# Altium PCB ALCT_MEZ_LX150T.PcbDoc (part 7 of 9)
Units mil, origin at the board's own origin, x right, y up, seen from the top; angles counter-clockwise.
Board outline 4101.98 x 5875.01 mil, 12 copper layers (Top Layer, Mid-Layer 1, +3V3, Mid-Layer 2, +1V2, Mid-Layer 4, +2V5, Mid-Layer 5, GND1, Mid-Layer 7, GND2, Bottom Layer), stack 64.7 mil thick; 378 components, 616 nets, 2492 pads, 1686 vias.
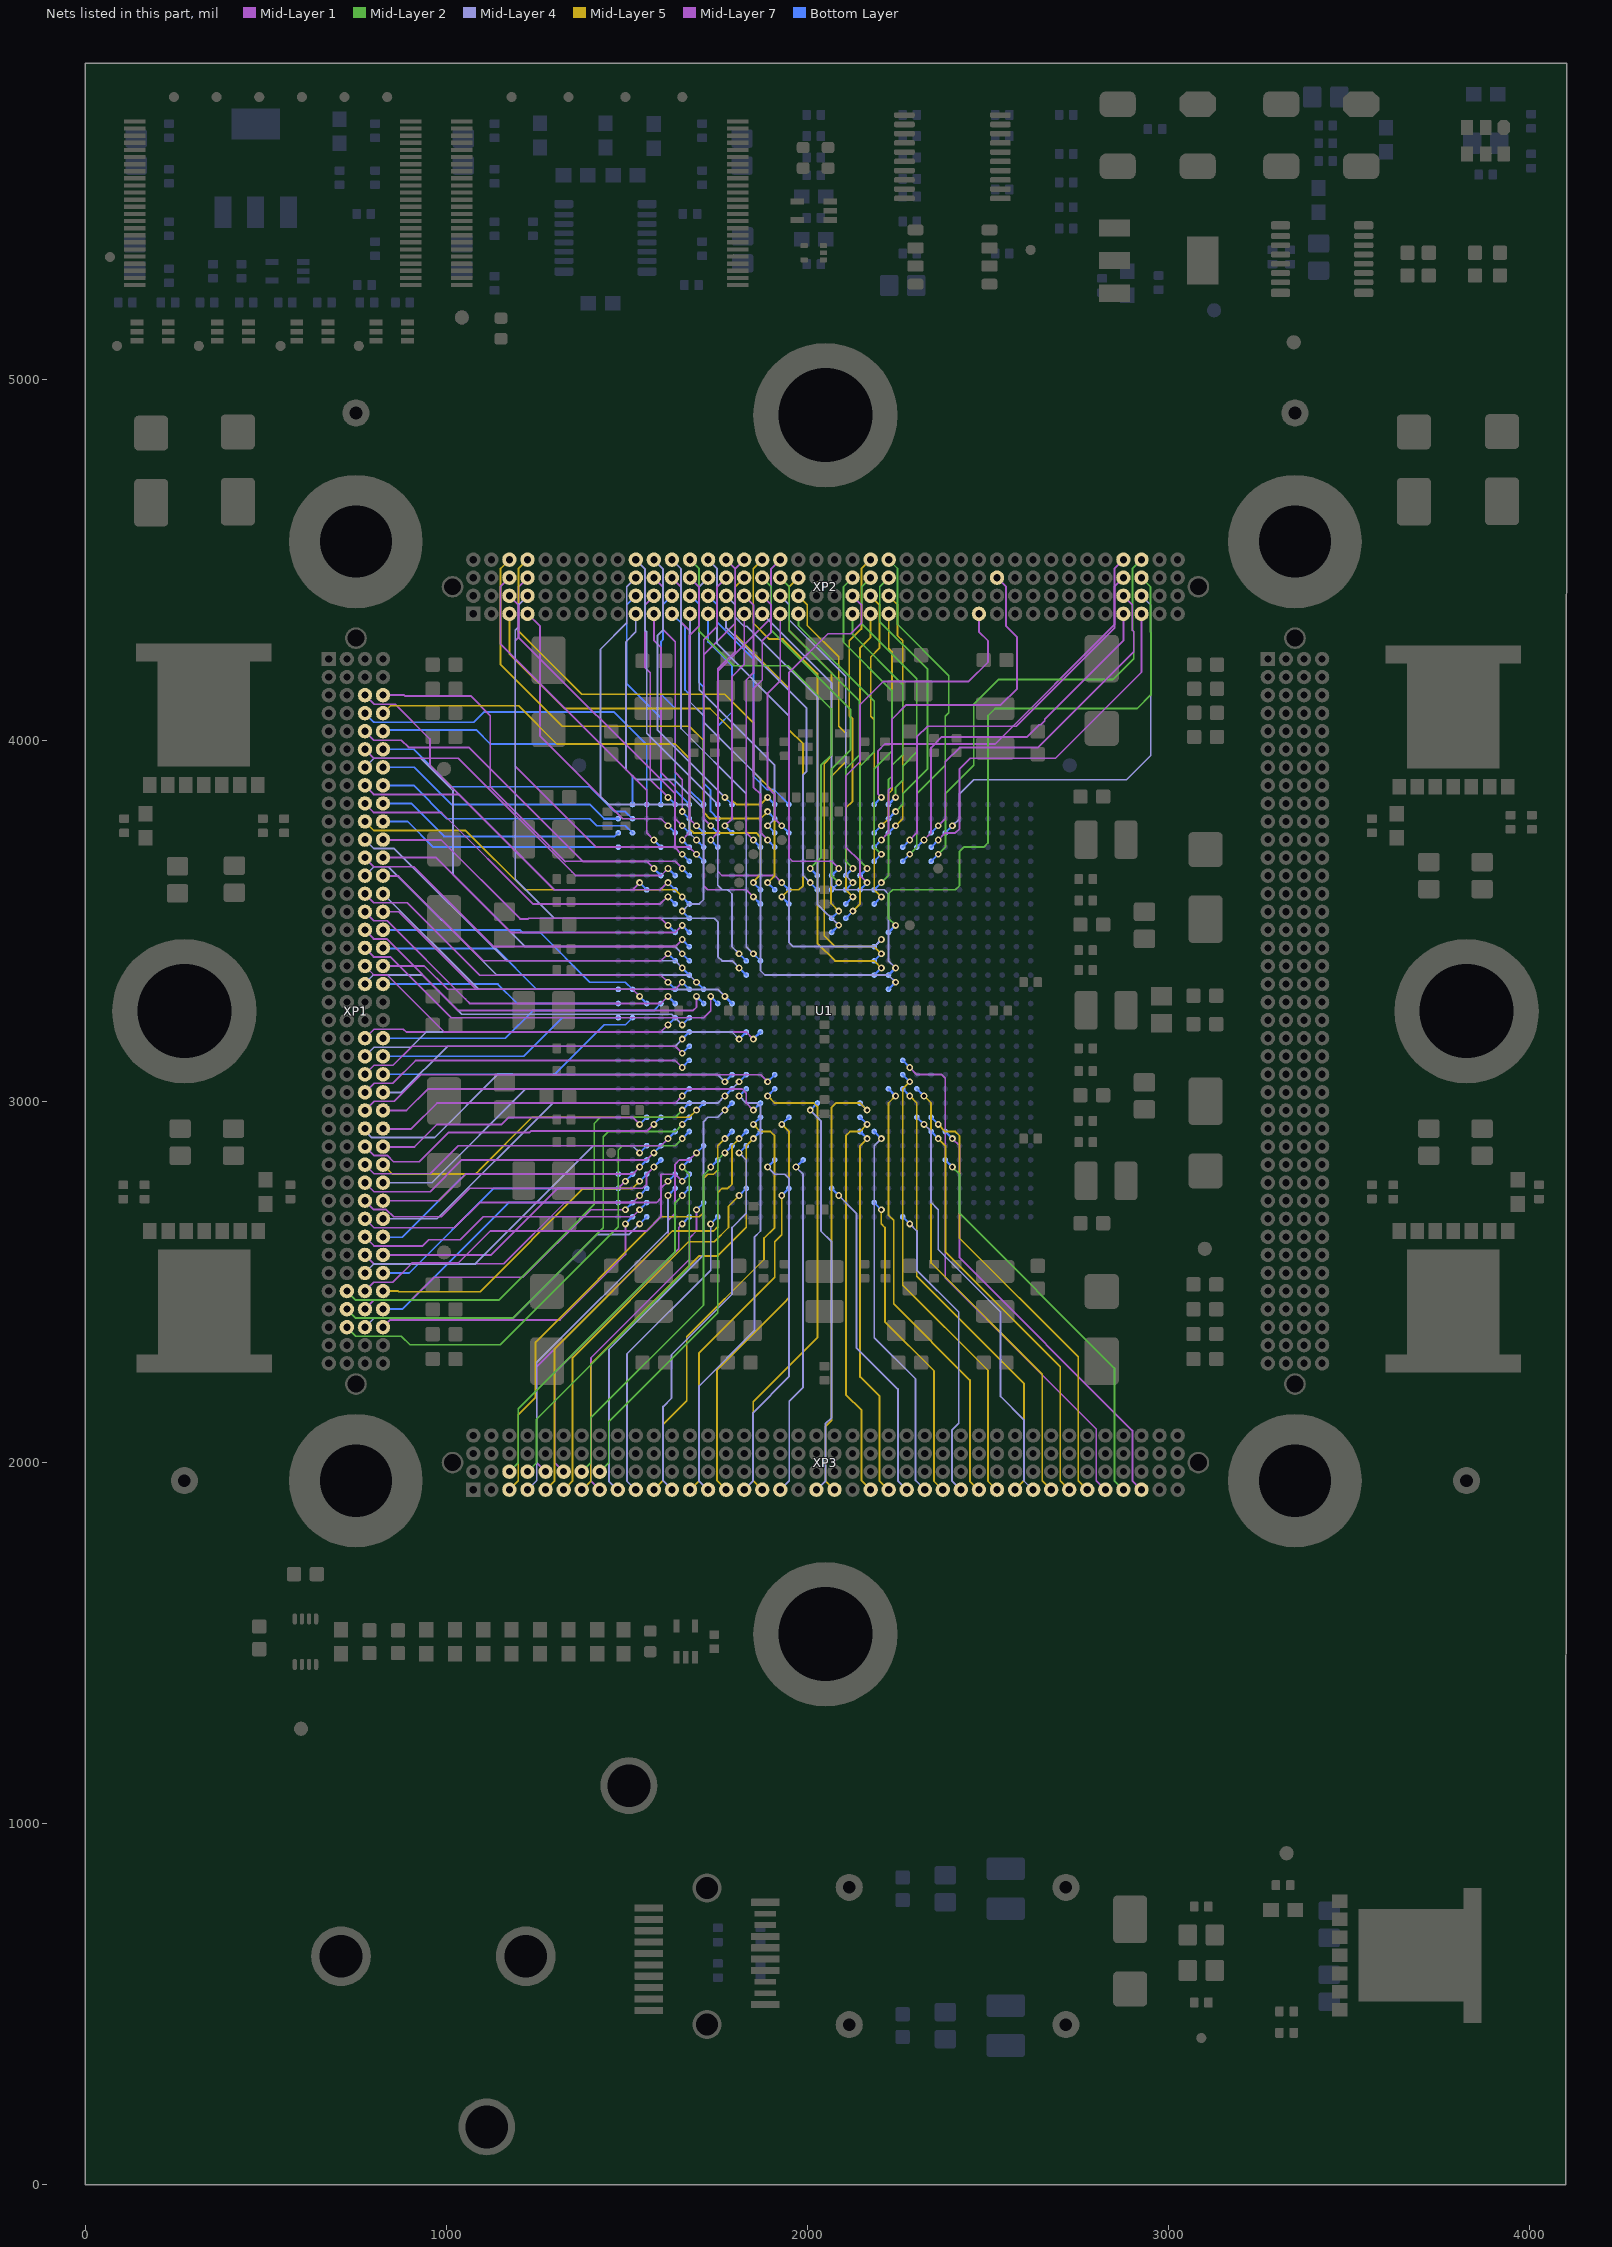
[diagram p16: the nets of this part, all layers, seen from the top]

## Via types
v1: diameter 19, hole 10, Top Layer to Bottom Layer, tented both sides, 1667 vias
v2: diameter 40, hole 20, Top Layer to Bottom Layer, 12 vias
v3: diameter 19, hole 10, Top Layer to Bottom Layer, 7 vias

## Nets (pads, with @x,y where several pads share a name; then routed paths per layer and width w, separated by ;. In a path a pad name is that pad's centre, name@x,y a point inside that pad or via, vN(x,y) a via of type N, cw(c..) or ccw(c..) an arc to the next point about the centre after c; other vN are vias at no path point) (continued)
XP1B_36: U1.AE9 XP1.B36 | length 1316
  Mid-Layer 2 w5: XP1.B36@725,2475.01 750,2450.01 1145.49,2450.01 1368.3,2672.81 1368.3,2673.32 1409.94,2714.97 1409.94,2938.88 1426.98,2955.92 1633.7,2955.92 v1(1653.56,2975.78)
  Bottom Layer w6: v1(1653.56,2975.78) U1.AE9@1673.23,2995.48
XP1B_37: U1.AE8 XP1.B37 | length 1336.6
  Mid-Layer 2 w5: XP1.B37@725,2425.01 750,2400.01 1184.07,2400.01 1434.55,2650.48 1434.55,2902.48 1448.62,2916.56 1633.7,2916.56 v1(1653.56,2936.42)
  Bottom Layer w6: v1(1653.56,2936.42) U1.AE8@1673.23,2956.11
XP1B_38: U1.AE7 XP1.B38 | length 1337.8
  Mid-Layer 2 w5: XP1.B38@725,2375.01 750,2350.01 875.98,2350.01 899.8,2326.19 1149.9,2326.19 1476.38,2652.66 1476.38,2865.57 1487.99,2877.19 1633.7,2877.19 v1(1653.56,2897.05)
  Bottom Layer w6: v1(1653.56,2897.05) U1.AE7@1673.23,2916.74
XP1C_3: U1.AH24 XP1.C3 | length 1067.1
  Mid-Layer 7 w5: XP1.C3@775,4120.08 XP1.C3@775,4125.01 800.5,4099.51 858.59,4099.51 954.72,4003.37 954.72,3930.5 1299.02,3586.2 1515.94,3586.2 v1(1535.44,3605.7)
  Bottom Layer w6: v1(1535.44,3605.7) U1.AH24@1555.13,3586.02
XP1C_4: U1.AH30 XP1.C4 | length 1004.4
  Bottom Layer w5: XP1.C4@775,4073.82 798,4050.82 800,4050.82 800.82,4050.01 1076.2,4050.01 1104.16,4077.97 1464.77,4077.97 1555.12,3987.62 U1.AH30@1555.12,3822.25
XP1C_5: U1.AG25 XP1.C5 | length 984.5
  Mid-Layer 1 w5: XP1.C5@775,4023.82 798.82,4000.01 875.98,4000.01 895.67,3980.32 1062.4,3980.32 1378.14,3664.58 1555.29,3664.58 v1(1574.81,3645.07)
  Bottom Layer w6: v1(1574.81,3645.07) U1.AG25@1594.49,3625.4
XP1C_6: U1.AF25 XP1.C6 | length 1033
  Mid-Layer 1 w5: XP1.C6@775,3973.82 798.82,3950.01 1033.66,3950.01 1358.1,3625.57 ; 1348.43,3635.24 1358.1,3625.57 ; v1(1614.18,3645.07) 1594.68,3625.57 1358.1,3625.57
  Bottom Layer w6: v1(1614.18,3645.07) U1.AF25@1633.86,3625.4
XP1C_7: U1.AE19 XP1.C7 | length 1277
  Mid-Layer 4 w5: XP1.C7@775,3925.01 800,3950.01 929.33,3950.01 1018.53,3860.8 1018.53,3628.54 1218.52,3428.55 1633.86,3428.55 v1(1653.57,3408.84)
  Bottom Layer w6: v1(1653.57,3408.84) U1.AE19@1673.23,3389.18
XP1C_8: U1.AF24 XP1.C8 | length 995.4
  Mid-Layer 1 w5: XP1.C8@775,3873.82 798.82,3850.01 1035.22,3850.01 1299.02,3586.2 1592.29,3586.2 v1@1614.29,3608.2
  Bottom Layer w6: v1(1614.18,3605.7) U1.AF24@1633.86,3586.02
XP1C_9: U1.AF23 XP1.C9 | length 991
  Mid-Layer 1 w5: XP1.C9@775,3823.82 798.82,3800.01 986.81,3800.01 1239.98,3546.83 1592.29,3546.83 v1@1614.29,3568.83
  Bottom Layer w6: v1(1614.18,3566.33) U1.AF23@1633.86,3546.66
XP1C_10: U1.AE23 XP1.C10 | length 992.8
  Mid-Layer 5 w5: XP1.C10@775,3775.01 800,3750.01 1054.03,3750.01 1218.01,3586.03 1633.87,3586.03 v1(1653.56,3566.33)
  Bottom Layer w6: v1(1653.56,3566.33) U1.AE23@1673.23,3546.66
XP1C_11: U1.AE18 XP1.C11 | length 1053.7
  Mid-Layer 4 w5: XP1.C11@775,3725.01 800,3700.01 856.36,3700.01 1167.02,3389.34 1633.7,3389.34 v1(1653.56,3369.48)
  Bottom Layer w6: v1(1653.56,3369.48) U1.AE18@1673.23,3349.81
XP1C_12: U1.AE20 XP1.C12 | length 1016
  Mid-Layer 1 w5: XP1.C12@775,3673.82 798.82,3650.01 910.43,3650.01 1131.75,3428.69 1634.07,3428.69 v1(1653.57,3448.19)
  Bottom Layer w6: v1(1653.57,3448.19) U1.AE20@1673.24,3428.52
XP1C_13: U1.AD17 XP1.C13 | length 1088.6
  Mid-Layer 4 w5: XP1.C13@775,3625.01 800,3650.01 839.57,3650.01 1139.59,3349.98 1673.06,3349.98 v1(1692.93,3330.12)
  Bottom Layer w6: v1(1692.93,3330.12) U1.AD17@1712.6,3310.44
XP1C_14: U1.AF17 XP1.C14 | length 968
  Mid-Layer 1 w5: XP1.C14@775,3573.82 798.82,3550.01 892.32,3550.01 1092.71,3349.62 1594.68,3349.62 v1(1614.18,3330.12)
  Bottom Layer w6: v1(1614.18,3330.12) U1.AF17@1633.86,3310.44
XP1C_15: U1.AF16 XP1.C15 | length 980.1
  Mid-Layer 1 w5: XP1.C15@775,3523.82 798.82,3500.01 836.71,3500.01 1053.33,3283.38 1053.33,3282.68 1064.76,3271.25 1594.68,3271.25 v1(1614.18,3290.75)
  Bottom Layer w6: v1(1614.18,3290.75) U1.AF16@1633.86,3271.07
XP1C_16: U1.AD16 XP1.C16 | length 1071.5
  Mid-Layer 1 w5: XP1.C16@775,3473.82 798.82,3450.01 834.84,3450.01 1033.46,3251.38 1683.07,3251.38 1692.93,3261.24 v1(1692.93,3290.75)
  Bottom Layer w6: v1(1692.93,3290.75) U1.AD16@1712.6,3271.07
XP1C_17: U1.AC16 XP1.C17 | length 1112.2
  Mid-Layer 1 w5: XP1.C17@775,3423.82 798.82,3400.01 845.47,3400.01 1013.78,3231.7 1712.6,3231.7 1732.29,3251.39 v1(1732.29,3290.75)
  Bottom Layer w6: v1(1732.29,3290.75) U1.AC16@1751.98,3271.07
XP1C_18: U1.AF15 XP1.C18 | length 950.7
  Mid-Layer 1 w5: XP1.C18@775,3375.01 800,3350.01 836.42,3350.01 993.92,3192.5 1594.68,3192.5 v1(1614.18,3212)
  Bottom Layer w6: v1(1614.18,3212) U1.AF15@1633.86,3231.7
XP1C_19: U1.AE15 XP1.C19 | length 975.3
  Mid-Layer 4 w5: XP1.C19@775,3325.01 775,3327.56 797.24,3349.81 935.04,3349.81 1043.31,3241.54 1624.02,3241.54 v1(1653.56,3212)
  Bottom Layer w6: v1(1653.56,3212) U1.AE15@1673.23,3231.7
XP1C_22: U1.Y14 XP1.C22 | length 1124.9
  Mid-Layer 7 w5: XP1.C22@775,3175.01 800,3200.01 881.4,3200.01 889.08,3192.33 1830.7,3192.33 v1(1850.39,3172.63)
  Bottom Layer w6: v1(1850.39,3172.63) U1.Y14@1870.08,3192.32
XP1C_23: U1.AA14 XP1.C23 | length 1099.9
  Mid-Layer 4 w5: XP1.C23@775,3125.01 800,3150.01 902.56,3150.01 944.88,3192.33 1791.34,3192.33 v1(1811.02,3172.64)
  Bottom Layer w6: v1(1811.02,3172.64) U1.AA14@1830.71,3192.33
XP1C_24: U1.AE13 XP1.C24 | length 947.7
  Mid-Layer 1 w5: XP1.C24@775,3073.82 XP1.C24@775.59,3074.41 ; XP1.C24@775,3075.01 800,3100.01 852.56,3100.01 905.51,3152.96 1633.87,3152.96 v1(1653.56,3133.27)
  Bottom Layer w6: v1(1653.56,3133.27) U1.AE13@1673.23,3152.96
XP1C_25: U1.AE12 XP1.C25 | length 951.1
  Mid-Layer 1 w5: XP1.C25@775,3025.01 800.5,3050.51 852.27,3050.51 915.17,3113.4 1634.06,3113.4 v1(1653.56,3093.9)
  Bottom Layer w6: v1(1653.56,3093.9) U1.AE12@1673.23,3113.59
XP1C_26: U1.W11 XP1.C26 | length 1191.7
  Mid-Layer 1 w5: XP1.C26@775,2975.01 800.5,3000.51 856.41,3000.51 929.93,3074.03 1870.28,3074.03 v1(1889.78,3054.53)
  Bottom Layer w6: v1(1889.78,3054.53) U1.W11@1909.45,3074.22
XP1C_27: U1.AB11 XP1.C27 | length 1118.5
  Mid-Layer 4 w5: XP1.C27@775,2925.01 775,2919.3 794.29,2900.01 967.52,2900.01 1141.73,3074.22 1751.97,3074.22 v1(1771.66,3054.53)
  Bottom Layer w6: v1(1771.66,3054.53) U1.AB11@1791.34,3074.22
XP1C_28: U1.AG8 XP1.C28 | length 887.8
  Mid-Layer 1 w5: XP1.C28@775,2875.01 799.5,2850.51 836.61,2850.51 854.04,2833.08 925.2,2833.08 1005.7,2913.58 1230.32,2913.58 1235.15,2918.42 1556.81,2918.42 v1(1574.81,2936.42)
  Bottom Layer w6: v1(1574.81,2936.42) U1.AG8@1594.49,2956.11
XP1C_29: U1.AF7 XP1.C29 | length 917.6
  Mid-Layer 1 w5: XP1.C29@775,2825.01 800,2800.01 956.1,2800.01 1033.65,2877.55 1594.68,2877.55 v1(1614.18,2897.05)
  Bottom Layer w6: v1(1614.18,2897.05) U1.AF7@1633.86,2916.74
XP1C_30: U1.AG6 XP1.C30 | length 882.6
  Mid-Layer 1 w5: XP1.C30@775,2775.01 800,2750.01 955.31,2750.01 1043.49,2838.18 1555.31,2838.18 v1(1574.81,2857.68)
  Bottom Layer w6: v1(1574.81,2857.68) U1.AG6@1594.49,2877.37
XP1C_31: U1.AG5 XP1.C31 | length 919.3
  Mid-Layer 1 w5: XP1.C31@775,2725.01 799.5,2700.51 834.15,2700.51 854.14,2680.52 986.2,2680.52 1065.13,2759.44 1543.51,2759.44 1554.93,2770.87 1554.93,2798.42 v1(1574.81,2818.3)
  Bottom Layer w6: v1(1574.81,2818.3) U1.AG5@1594.49,2838
XP1C_32: U1.AH3 XP1.C32 | length 835.7
  Mid-Layer 1 w5: XP1.C32@775,2675.01 800,2650.01 1022.64,2650.01 1092.52,2719.89 1515.76,2719.89 v1(1535.44,2739.57)
  Bottom Layer w6: v1(1535.44,2739.57) U1.AH3@1555.12,2759.26
XP1C_33: U1.AH2 XP1.C33 | length 840.1
  Mid-Layer 1 w5: XP1.C33@775,2625.01 800,2600.01 935.04,2600.01 952.17,2617.13 1038.98,2617.13 1102.36,2680.52 1515.76,2680.52 v1@1536.12,2700.87
  Bottom Layer w6: v1@1536.12,2700.87 U1.AH2@1555.12,2719.89
  other v1: 1535.43,2700.2
XP1C_34: U1.AF4 XP1.C34 | length 987.9
  Mid-Layer 7 w5: XP1.C34@775,2575.01 799.5,2550.51 1159.36,2550.51 1328.92,2720.07 1582.89,2720.07 1594.31,2731.49 1594.31,2759.07 v1(1614.18,2778.93)
  Bottom Layer w6: v1(1614.18,2778.93) U1.AF4@1633.86,2798.62
XP1C_35: U1.AH6 XP1.C35 | length 942.4
  Mid-Layer 4 w5: XP1.C35@775,2525.01 800,2550.01 1080.12,2550.01 1407.48,2877.37 1515.76,2877.37 v1(1535.44,2857.68)
  Bottom Layer w6: v1(1535.44,2857.68) U1.AH6@1555.12,2877.37
XP1C_36: U1.AE4 XP1.C36 | length 1117.8
  Mid-Layer 1 w5: XP1.C36@775,2475.01 799.5,2499.51 852.45,2499.51 905.51,2552.56 1033.46,2552.56 1122.05,2641.15 1555.12,2641.15 1594.49,2680.52 1594.49,2798.63 1633.87,2798.63 v1(1653.56,2778.93)
  Bottom Layer w6: v1(1653.56,2778.93) U1.AE4@1673.24,2798.62
XP1C_37: U1.AJ2 XP1.C37 | length 862.9
  Mid-Layer 7 w5: XP1.C37@775,2425.01 800.5,2450.51 903.86,2450.51 966.37,2513.01 1212.4,2513.01 1399.59,2700.2 v1(1496.06,2700.2)
  Bottom Layer w6: v1(1496.06,2700.2) U1.AJ2@1515.75,2719.89
XP1C_38: U1.AH1 XP1.C38 | length 906.7
  Mid-Layer 4 w5: XP1.C38@775,2375.01 800,2400.01 1186.02,2400.01 1417.32,2631.3 1505.91,2631.3 v1(1535.43,2660.83)
  Bottom Layer w5: v1(1535.43,2660.83) U1.AH1@1555.12,2680.52
XP1D_3: U1.AE25 XP1.D3 | length 1171.1
  Mid-Layer 7 w5: XP1.D3@825,4125.01 883.47,4125.01 885.83,4122.65 1067.71,4122.65 1122.05,4068.31 1122.05,3871.46 1329.43,3664.08 1330.11,3664.77 1633.85,3664.77 v1(1653.56,3645.07)
  Bottom Layer w6: v1(1653.56,3645.07) U1.AE25@1673.23,3625.4
XP1D_4: U1.Y24 XP1.D4 | length 1480.4
  Mid-Layer 5 w5: XP1.D4@825,4075.01 845.68,4095.69 1200.48,4095.69 1306.59,3989.57 1633.86,3989.57 1673.23,3950.2 1673.23,3755.32 1685.04,3743.51 1858.28,3743.51 1869.9,3731.89 1869.9,3627.72 1850.39,3608.21 v1(1850.39,3605.7)
  Bottom Layer w6: v1(1850.39,3605.7) U1.Y24@1870.06,3586.03
XP1D_5: U1.AJ30 XP1.D5 | length 826.2
  Bottom Layer w5: XP1.D5@825,4025.01 825,4028.76 1082.88,4028.76 1122.07,3989.57 1427.17,3989.57 1515.76,3900.98 U1.AJ30@1515.75,3822.25
XP1D_6: U1.AJ29 XP1.D6 | length 770.3
  Bottom Layer w5: XP1.D6@825,3975.01 910.24,3975.01 1013.78,3871.46 1397.64,3871.46 1466.54,3802.56 1496.06,3802.56 U1.AJ29@1515.75,3782.88
XP1D_7: U1.AK29 XP1.D7 | length 710.3
  Bottom Layer w5: XP1.D7@825,3925.01 911.02,3925.01 1013.78,3822.25 1397.64,3822.25 1437.01,3782.88
  Bottom Layer w6: 1437.01,3782.88 U1.AK29@1476.38,3782.88
XP1D_8: U1.AJ28 XP1.D8 | length 745.2
  Bottom Layer w5: XP1.D8@825,3875.01 909.84,3875.01 1001.97,3782.88 1397.64,3782.88 1417.32,3763.19 1496.06,3763.19 U1.AJ28@1515.75,3743.51
XP1D_9: U1.AK28 XP1.D9 | length 693.3
  Bottom Layer w5: XP1.D9@825,3825.01 902.76,3825.01 994.09,3733.67 1466.54,3733.67 U1.AK28@1476.38,3743.51
XP1D_10: U1.AK27 XP1.D10 | length 680.7
  Bottom Layer w5: XP1.D10@825,3775.01 893.7,3775.01 964.57,3704.14 U1.AK27@1476.38,3704.14
XP1D_11: U1.AF21 XP1.D11 | length 916.2
  Mid-Layer 1 w5: XP1.D11@825,3723.82 986.2,3723.82 1204.52,3505.51 1226.58,3505.51 1228.18,3507.1 1593.56,3507.1 1613.06,3487.6 v1(1614.18,3487.6)
  Bottom Layer w6: v1(1614.18,3487.6) U1.AF21@1633.86,3467.92
XP1D_12: U1.AE21 XP1.D12 | length 950.3
  Mid-Layer 1 w5: XP1.D12@825,3675.01 972.07,3675.01 1179.1,3467.97 1633.93,3467.97 v1(1653.56,3487.6)
  Bottom Layer w6: v1(1653.56,3487.6) U1.AE21@1673.23,3467.92
XP1D_13: U1.AF19 XP1.D13 | length 922.2
  Mid-Layer 1 w5: XP1.D13@825,3623.82 867.72,3623.82 1102.2,3389.34 1594.68,3389.34 v1(1614.18,3408.84)
  Bottom Layer w6: v1(1614.18,3408.84) U1.AF19@1633.86,3389.18
XP1D_14: U1.AB16 XP1.D14 | length 1092.2
  Mid-Layer 4 w5: XP1.D14@825,3575.01 1089.57,3310.44 1623.83,3310.44 1624.02,3310.25 1752.16,3310.25 v1(1771.66,3290.75)
  Bottom Layer w6: v1(1771.66,3290.75) U1.AB16@1791.34,3271.07
XP1D_15: U1.AE17 XP1.D15 | length 953.4
  Mid-Layer 1 w5: XP1.D15@825,3525.01 868.11,3525.01 1082.63,3310.49 1633.93,3310.49 v1(1653.56,3330.12)
  Bottom Layer w6: v1(1653.56,3330.12) U1.AE17@1673.23,3310.44
XP1D_16: U1.AJ17 XP1.D16 | length 758.9
  Bottom Layer w5: XP1.D16@825,3475.01 1203.54,3475.01 1210.44,3468.1 1259.66,3468.1 1397.64,3330.12 1496.06,3330.12 U1.AJ17@1515.75,3310.44
XP1D_17: U1.AK17 XP1.D17 | length 698.4
  Bottom Layer w5: XP1.D17@825,3423.82 1136.61,3423.82 1250,3310.44 U1.AK17@1476.38,3310.44
XP1D_18: U1.AH16 XP1.D18 | length 777.9
  Mid-Layer 7 w5: XP1.D18@825,3375.01 939.37,3375.01 1003.94,3310.44 1515.75,3310.44 v1(1535.43,3290.75)
  Bottom Layer w6: v1@1532.11,3294.08 U1.AH16@1555.12,3271.07
XP1D_19: U1.AK16 XP1.D19 | length 673.7
  Bottom Layer w5: XP1.D19@825,3325.01 1142.93,3325.01 1196.87,3271.07 U1.AK16@1476.38,3271.07
XP1D_22: U1.AG16 XP1.D22 | length 809.3
  Bottom Layer w5: XP1.D22@825,3175.01 1163.78,3175.01 1240.16,3251.38 1574.8,3251.38 U1.AG16@1594.49,3271.07
XP1D_23: U1.AK15 XP1.D23 | length 695.6
  Bottom Layer w5: XP1.D23@825,3125.01 1214.16,3125.01 1320.85,3231.7 U1.AK15@1476.38,3231.7
XP1D_24: U1.AJ15 XP1.D24 | length 755.7
  Bottom Layer w5: XP1.D24@825,3075.01 1300,3075.01 1437.31,3212.32 1496.37,3212.32 U1.AJ15@1515.75,3231.7
XP1D_25: U1.AE14 XP1.D25 | length 917.5
  Mid-Layer 4 w5: XP1.D25@825,3025.01 875.98,3025.01 1003.94,3152.96 1633.89,3152.96 v1(1653.56,3172.63)
  Bottom Layer w6: v1(1653.56,3172.63) U1.AE14@1673.24,3192.32
XP1D_26: U1.Y9 XP1.D26 | length 1118.6
  Mid-Layer 1 w5: XP1.D26@825,2975.01 889.96,2975.01 949.73,3034.78 1818.97,3034.78 1830.53,3023.23 1830.53,2995.65 v1(1850.39,2975.78)
  Bottom Layer w6: v1(1850.39,2975.78) U1.Y9@1870.08,2995.48
XP1D_27: U1.AE10 XP1.D27 | length 894.2
  Mid-Layer 1 w5: XP1.D27@825,2923.82 902.76,2923.82 974.58,2995.65 1634.06,2995.65 v1(1653.56,3015.15)
  Bottom Layer w6: v1(1653.56,3015.15) U1.AE10@1673.23,3034.85
XP1D_28: U1.AH8 XP1.D28 | length 780.4
  Mid-Layer 1 w5: XP1.D28@825,2873.82 911.81,2873.82 974.41,2936.42 1153.53,2936.42 1173.03,2955.92 1515.94,2955.92 v1(1535.44,2936.42)
  Bottom Layer w6: v1(1535.44,2936.42) U1.AH8@1555.12,2956.11
XP1D_29: U1.AD9 XP1.D29 | length 980.2
  Mid-Layer 5 w5: XP1.D29@825,2825.01 851.19,2798.81 1080.91,2798.81 1092.33,2810.24 1092.33,2810.75 1237.51,2955.92 1673.07,2955.92 v1(1692.93,2975.78)
  Bottom Layer w6: v1(1692.93,2975.78) U1.AD9@1712.6,2995.48
XP1D_30: U1.AA11 XP1.D30 | length 1129.6
  Mid-Layer 4 w5: XP1.D30@825,2775.01 960.63,2775.01 1220.47,3034.85 1791.34,3034.85 v1(1811.03,3054.53)
  Bottom Layer w6: v1(1811.03,3054.53) U1.AA11@1830.71,3074.22
XP1D_31: U1.AH5 XP1.D31 | length 781.1
  Mid-Layer 1 w5: XP1.D31@825,2723.82 XP1.D31@828.25,2720.57 ; XP1.D31@825,2725.01 979.53,2725.01 1053.32,2798.8 1515.94,2798.8 v1@1535.13,2817.99
  Bottom Layer w6: v1(1535.44,2818.3) U1.AH5@1555.12,2838
XP1D_32: U1.AB10 XP1.D32 | length 1115.4
  Mid-Layer 4 w5: XP1.D32@825,2675.01 974.41,2675.01 1294.88,2995.48 1751.99,2995.48 v1(1771.66,3015.15)
  Bottom Layer w6: v1(1771.66,3015.15) U1.AB10@1791.34,3034.85
XP1D_33: U1.AK4 XP1.D33 | length 723.8
  Bottom Layer w5: XP1.D33@825,2623.82 878.35,2623.82 1053.15,2798.63 U1.AK4@1476.38,2798.63
XP1D_34: U1.AJ4 XP1.D34 | length 783.4
  Mid-Layer 7 w5: XP1.D34@825,2575.01 1124.8,2575.01 1309.06,2759.26 1476.38,2759.26 v1(1496.06,2778.94)
  Bottom Layer w6: v1@1496.09,2778.94 U1.AJ4@1515.76,2798.62
XP1D_35: U1.AK3 XP1.D35 | length 748.4
  Bottom Layer w5: XP1.D35@825,2525.01 897.64,2525.01 1131.89,2759.26 U1.AK3@1476.38,2759.26
XP1D_36: U1.AH4 XP1.D36 | length 865.6
  Mid-Layer 5 w5: XP1.D36@825,2475.01 866.14,2475.01 867.93,2473.22 1093.87,2473.22 1379.9,2759.26 1515.75,2759.26 v1(1535.43,2778.94)
  Bottom Layer w6: v1(1535.43,2778.94) U1.AH4@1555.13,2798.62
XP1D_37: U1.AK2 XP1.D37 | length 773.5
  Bottom Layer w5: XP1.D37@825,2425.01 878.36,2425.01 1173.25,2719.89 U1.AK2@1476.38,2719.89
XP1D_38: U1.AJ1 XP1.D38 | length 867
  Mid-Layer 7 w5: XP1.D38@825,2375.01 825,2375.21 844.87,2395.08 1314.98,2395.08 1496.06,2576.17 v1(1496.06,2660.83)
  Bottom Layer w6: v1(1496.06,2660.83) U1.AJ1@1515.75,2680.52
XP2A_3: U1.W30 XP2.A3 | length 1146.8
  Mid-Layer 5 w5: XP2.A3@1175,4350.01 1175,4239.79 1326.79,4088 1730.33,4088 1791.15,4027.18 1791.15,3834.23 1802.95,3822.43 1870.26,3822.43 v1(1889.76,3841.93)
  Bottom Layer w6: v1(1889.76,3841.93) U1.W30@1909.45,3822.25
XP2A_4: U1.AF28 XP2.A4 | length 838.1
  Mid-Layer 7 w5: XP2.A4@1225,4350.01 1259.84,4315.16 1259.84,4011.21 1488.36,3782.69 1594.68,3782.69 v1(1614.18,3763.19)
  Bottom Layer w6: v1(1614.18,3763.19) U1.AF28@1633.86,3743.51
XP2A_10: U1.AE22 XP2.A10 | length 1054.1
  Mid-Layer 4 w5: XP2.A10@1525,4350.01 1525,4300.01 1497.69,4272.69 1497.69,3919.05 1525.59,3891.15 1631.91,3891.15 1712.6,3810.46 1712.6,3576.19 1712.43,3576.01 1712.43,3558.26 1701,3546.83 1683.25,3546.83 1683.05,3546.64 1673.23,3546.64 v1(1653.56,3526.97)
  Bottom Layer w6: v1(1653.56,3526.97) U1.AE22@1673.23,3507.29
XP2A_11: U1.AE28 XP2.A11 | length 647.2
  Mid-Layer 7 w5: XP2.A11@1575,4350.01 1575,4276.76 1594.49,4257.27 1594.49,3910.83 1633.86,3871.46 1633.86,3782.9 v1(1653.57,3763.19)
  Bottom Layer w6: v1(1653.57,3763.19) U1.AE28@1673.23,3743.51
XP2A_12: U1.AD30 XP2.A12 | length 564.1
  Bottom Layer w5: XP2.A12@1625,4350.01 1661.44,4313.57 1661.44,4139.16 1673.23,4127.37 1673.23,3861.62 U1.AD30@1712.6,3822.25
XP2A_13: U1.L17 XP2.A13 | length 1484.1
  Mid-Layer 4 w5: XP2.A13@1675,4350.01 1675,4105.91 1712.78,4068.13 1712.78,4050.39 1870.08,3893.1 1870.08,3361.61 1881.7,3349.98 2224.23,3349.98 v1(2244.09,3330.12)
  Bottom Layer w6: U1.L17@2224.41,3310.44 v1(2244.09,3330.12)
XP2A_14: U1.AC30 XP2.A14 | length 571.5
  Bottom Layer w5: XP2.A14@1725,4350.01 1725,4272.45 1791.34,4206.11 1791.34,4078.16 1751.97,4038.79 U1.AC30@1751.97,3822.25
XP2A_15: U1.T24 XP2.A15 | length 876.8
  Mid-Layer 4 w5: XP2.A15@1775,4350.01 1775,4311.03 1997.85,4088.18 1997.85,3913.62 1988.19,3903.96 1988.19,3625.75 1988.01,3625.57 v1(2007.88,3605.7)
  Bottom Layer w6: v1(2007.88,3605.7) U1.T24@2027.56,3586.02
XP2A_16: U1.AB28 XP2.A16 | length 636.7
  Mid-Layer 1 w5: v1(1771.67,3763.19) 1791.52,3783.05 1791.52,4176.58 1825,4210.06 XP2.A16@1825,4350.01
  Bottom Layer w6: v1(1771.67,3763.19) U1.AB28@1791.34,3743.51
XP2A_17: U1.L18 XP2.A17 | length 1239.7
  Mid-Layer 4 w5: XP2.A17@1875,4350.01 2066.93,4158.08 2066.93,3597.82 2078.55,3586.2 2212.44,3586.2 2224.23,3574.41 2224.23,3438.4 2224.22,3389.36 v1(2244.09,3369.48)
  Bottom Layer w6: U1.L18@2224.41,3349.81 v1(2244.09,3369.48)
XP2A_18: U1.V28 XP2.A18 | length 645.5
  Mid-Layer 1 w5: XP2.A18@1925,4350.01 1925,4164.97 1889.76,4129.74 1889.76,3869.51 1909.63,3849.64 1909.63,3782.71 v1(1929.15,3763.19)
  Bottom Layer w6: v1(1929.15,3763.19) U1.V28@1948.82,3743.51
XP2A_19: U1.N25 XP2.A19 | length 843.9
  Mid-Layer 2 w5: XP2.A19@1975,4350.01 1975,4317.72 2184.85,4107.87 2184.85,3967.75 2145.85,3928.75 2145.85,3664.58 v1(2165.36,3645.07)
  Bottom Layer w6: U1.N25@2145.68,3625.38 v1(2165.36,3645.07)
XP2A_22: U1.M24 XP2.A22 | length 854.2
  Mid-Layer 2 w5: XP2.A22@2125,4350.01 2125,4292.7 2263.78,4153.92 2263.78,3960.05 2234.25,3930.52 2234.25,3900.99 2224.24,3890.97 2224.24,3692.7 2224.36,3692.58 2224.36,3625.33 v1(2204.73,3605.7)
  Bottom Layer w6: U1.M24@2185.04,3586.02 v1(2204.73,3605.7)
XP2A_23: U1.P22 XP2.A23 | length 871.2
  Mid-Layer 5 w5: v1(2125.99,3526.97) 2145.5,3546.48 2145.5,4255.15 2175,4284.65 XP2.A23@2175,4350.01
  Bottom Layer w6: U1.P22@2106.3,3507.29 v1(2125.99,3526.97)
XP2A_24: U1.M28 XP2.A24 | length 630.7
  Mid-Layer 5 w5: v1(2204.72,3763.19) 2224.59,3783.07 2224.59,3851.96 2234.25,3861.62 2234.25,4245.48 2225,4254.73 XP2.A24@2225,4350.01
  Bottom Layer w6: U1.M28@2185.04,3743.51 v1(2204.72,3763.19)
XP2A_29: U1.N24 XP2.A29 | length 1108.4
  Mid-Layer 1 w5: v1(2165.36,3605.7) 2145.86,3625.2 2145.86,3664.58 2106.36,3704.08 2106.36,3901.05 2145.67,3940.36 2145.67,4097.84 2210.63,4162.8 2446.85,4162.8 2500,4215.95 2500,4275.01 2475,4300.01 XP2.A29@2475,4350.01
  Bottom Layer w6: U1.N24@2145.68,3586.02 v1(2165.36,3605.7)
XP2A_37: U1.J27 XP2.A37 | length 1023.4
  Mid-Layer 1 w5: v1(2322.84,3723.82) 2342.34,3743.32 2342.34,3979.55 2372.05,4009.26 2608.27,4009.26 2641.92,4042.91 2645.87,4042.91 2657.3,4054.33 2657.3,4058.29 2875,4275.99 XP2.A37@2875,4350.01
  Bottom Layer w6: U1.J27@2303.15,3704.14 v1(2322.84,3723.82)
XP2A_38: U1.H27 XP2.A38 | length 1041.7
  Mid-Layer 1 w5: v1(2362.21,3723.82) 2381.71,3743.32 2409.28,3743.32 2421.26,3755.3 2421.26,3920.67 2450.79,3950.2 2687.01,3950.2 2925,4188.19 XP2.A38@2925,4350.01
  Bottom Layer w6: U1.H27@2342.52,3704.14 v1(2362.21,3723.82)
XP2B_3: U1.AE26 XP2.B3 | length 943.1
  Mid-Layer 1 w5: XP2.B3@1175,4400.01 1200,4375.01 1200,4285.64 1633.68,3851.95 1633.68,3701.8 1651.03,3684.45 v1(1653.56,3684.45)
  Bottom Layer w6: v1(1653.56,3684.45) U1.AE26@1673.23,3664.77
XP2B_4: U1.AA18 XP2.B4 | length 1604.9
  Mid-Layer 4 w5: XP2.B4@1225,4400.01 1200.5,4375.51 1200.5,4314.38 1190.94,4304.82 1190.94,3615.56 1299.21,3507.29 1742.13,3507.29 1752.16,3497.26 1752.16,3400.77 1763.95,3388.98 1791.53,3388.98 v1(1811.03,3369.48)
  Bottom Layer w6: v1(1811.03,3369.48) U1.AA18@1830.71,3349.81
XP2B_10: U1.AG30 XP2.B10 | length 627.2
  Bottom Layer w5: XP2.B10@1525,4400.01 1500,4375.01 1500,4156.88 1594.49,4062.39 U1.AG30@1594.49,3822.25
XP2B_11: U1.AF30 XP2.B11 | length 622.4
  Mid-Layer 7 w5: XP2.B11@1575,4400.01 1550.5,4375.51 1550.5,4200.88 1564.96,4186.42 1564.96,3891.15 v1(1614.17,3841.93)
  Bottom Layer w5: v1(1614.17,3841.93) U1.AF30@1633.86,3822.25
XP2B_12: U1.AE30 XP2.B12 | length 622.9
  Bottom Layer w5: XP2.B12@1625,4400.01 1600,4375.01 1600,4278.57 1594.67,4273.24 1594.67,4127.18 1633.86,4088 1633.86,3861.62 U1.AE30@1673.23,3822.25
XP2B_13: U1.AC29 XP2.B13 | length 649.7
  Bottom Layer w5: XP2.B13@1675,4400.01 1676.18,4400.01 1700,4376.19 1700,4159.65 1712.6,4147.05 1712.6,3881.3 1731.96,3861.95 1731.96,3802.89 U1.AC29@1751.97,3782.88
XP2B_14: U1.V30 XP2.B14 | length 682
  Bottom Layer w5: XP2.B14@1725,4400.01 1750,4375.01 1750,4326.19 1850.39,4225.79 1850.39,3900.99 1887.81,3863.57 1907.5,3863.57 U1.V30@1948.82,3822.25
XP2B_15: U1.R21 XP2.B15 | length 1073.8
  Mid-Layer 4 w5: XP2.B15@1775,4400.01 1800,4375.01 1800,4340.35 1824.49,4315.86 1832.19,4315.86 2027.74,4120.31 2027.74,3546.47 v1(2086.61,3487.6)
  Bottom Layer w6: U1.R21@2066.93,3467.92 v1(2086.61,3487.6)
XP2B_16: U1.Y27 XP2.B16 | length 730.7
  Mid-Layer 1 w5: XP2.B16@1825,4400.01 1850.39,4374.61 1850.39,4186.42 1830.89,4166.92 1830.89,3743.32 v1(1850.39,3723.82)
  Bottom Layer w6: v1(1850.39,3723.82) U1.Y27@1870.08,3704.14
XP2B_17: U1.W27 XP2.B17 | length 750.7
  Mid-Layer 1 w5: XP2.B17@1875,4400.01 1899.5,4375.51 1899.5,4299.32 1875.18,4275.01 1875.18,4166.74 1850.58,4142.13 1850.58,3869.7 1870.26,3850.01 1870.26,3743.69 1889.78,3724.18 v1(1889.78,3723.82)
  Bottom Layer w6: v1(1889.78,3723.82) U1.W27@1909.45,3704.14
XP2B_18: U1.P24 XP2.B18 | length 905.4
  Mid-Layer 4 w5: XP2.B18@1925,4400.01 1950,4375.01 1950,4332.88 2106.13,4176.75 2106.13,3625.57 v1(2125.99,3605.7)
  Bottom Layer w6: U1.P24@2106.31,3586.02 v1(2125.99,3605.7)
XP2B_19: U1.R22 XP2.B19 | length 980.7
  Mid-Layer 5 w5: XP2.B19@1975,4400.01 1999.5,4375.51 1999.5,4317.83 2086.61,4230.71 2086.61,4038.79 2106.11,4019.29 2106.11,3940.17 2065.56,3899.62 2065.56,3548.04 v1(2086.63,3526.97)
  Bottom Layer w6: U1.R22@2066.93,3507.29 v1(2086.63,3526.97)
XP2B_22: U1.R25 XP2.B22 | length 1033.7
  Mid-Layer 1 w5: v1(2086.63,3645.07) 2066.93,3664.77 1958.66,3664.77 1948.82,3674.61 1948.82,4186.42 2057.09,4294.69 2120.47,4294.69 2149.5,4323.72 2149.5,4375.51 XP2.B22@2125,4400.01
  Bottom Layer w6: U1.R25@2066.93,3625.4 v1(2086.63,3645.07)
XP2B_23: U1.M23 XP2.B23 | length 894
  Mid-Layer 5 w5: XP2.B23@2175,4400.01 2199.5,4375.51 2199.5,4254.83 2175.2,4230.53 2175.2,4066.37 2184.86,4056.71 2184.86,3586.2 v1(2204.73,3566.33)
  Bottom Layer w6: U1.M23@2185.04,3546.66 v1(2204.73,3566.33)
XP2B_24: U1.L28 XP2.B24 | length 688.9
  Mid-Layer 5 w5: XP2.B24@2225,4400.01 2249.5,4375.51 2249.5,4289.29 2263.78,4275.01 2263.78,3782.89 v1(2244.09,3763.19)
  Bottom Layer w6: U1.L28@2224.41,3743.51 v1(2244.09,3763.19)
XP2B_37: U1.H28 XP2.B37 | length 1027.4
  Mid-Layer 1 w5: v1(2362.2,3763.19) 2381.89,3782.88 2381.89,3940.36 2421.26,3979.73 2637.8,3979.73 2903.36,4245.29 2903.36,4301.17 2899.5,4305.03 2899.5,4375.51 XP2.B37@2875,4400.01
  Bottom Layer w6: U1.H28@2342.52,3743.51 v1(2362.2,3763.19)
XP2B_38: U1.G28 XP2.B38 | length 1150.5
  Mid-Layer 4 w5: v1(2401.57,3763.19) 2421.26,3782.88 2421.26,3851.78 2421.55,3851.78 2460.63,3890.85 2883.56,3890.85 2950.5,3957.79 2950.5,4374.51 XP2.B38@2925,4400.01
  Bottom Layer w6: U1.G28@2381.89,3743.51 v1(2401.57,3763.19)
XP2C_3: U1.AG27 XP2.C3 | length 940.3
  Mid-Layer 1 w5: XP2.C3@1175,4450.01 1150,4425.01 1150,4266.74 1554.95,3861.79 1554.95,3743.68 v1(1574.81,3723.82)
  Bottom Layer w6: v1(1574.81,3723.82) U1.AG27@1594.49,3704.14
XP2C_4: U1.AD26 XP2.C4 | length 1166.4
  Mid-Layer 7 w5: XP2.C4@1225,4450.01 1200.5,4425.51 1200.5,4285.14 1191.13,4275.76 1191.13,3928.2 1415.19,3704.14 1673.24,3704.14 v1(1692.93,3684.45)
  Bottom Layer w6: v1(1692.93,3684.45) U1.AD26@1712.6,3664.77
XP2C_10: U1.AD27 XP2.C10 | length 1030.5
  Mid-Layer 4 w5: XP2.C10@1525,4450.01 1500,4425.01 1500,4325.01 1427.17,4252.17 1427.17,3843.89 1448.8,3822.25 1663.59,3822.25 1673.43,3812.41 1673.43,3743.31 v1(1692.93,3723.82)
  Bottom Layer w6: v1(1692.93,3723.82) U1.AD27@1712.6,3704.14
XP2C_11: U1.AE29 XP2.C11 | length 707.4
  Mid-Layer 7 w5: XP2.C11@1575,4450.01 1599.5,4425.51 1599.5,4307.41 1633.86,4273.06 1633.86,3910.83 1653.54,3891.15 v1(1653.54,3802.56)
  Bottom Layer w6: v1@1653.86,3802.25 U1.AE29@1673.23,3782.88
XP2C_12: U1.AE27 XP2.C12 | length 782
  Mid-Layer 7 w5: XP2.C12@1625,4450.01 1649.5,4425.51 1649.5,4328.26 1673.07,4304.69 1673.07,3743.33 v1(1653.56,3723.82)
  Bottom Layer w6: v1(1653.56,3723.82) U1.AE27@1673.23,3704.14
XP2C_13: U1.AD28 XP2.C13 | length 743.7
  Mid-Layer 1 w5: XP2.C13@1675,4450.01 1699.5,4425.51 1699.5,4315.63 1673.41,4289.54 1673.41,3782.71 v1(1692.93,3763.19)
  Bottom Layer w6: v1(1692.93,3763.19) U1.AD28@1712.6,3743.51
XP2C_14: U1.W28 XP2.C14 | length 819.3
  Mid-Layer 4 w5: XP2.C14@1725,4450.01 1700.5,4425.51 1700.5,4139.47 1909.26,3930.7 1909.26,3782.67 v1(1889.78,3763.19)
  Bottom Layer w6: v1(1889.78,3763.19) U1.W28@1909.45,3743.51
XP2C_15: U1.AC28 XP2.C15 | length 748.5
  Mid-Layer 1 w5: v1(1732.3,3763.19) 1712.78,3782.71 1712.78,4278.41 1750,4315.63 1750,4425.01 XP2.C15@1775,4450.01
  Bottom Layer w6: v1(1732.3,3763.19) U1.AC28@1751.98,3743.52
XP2C_16: U1.V23 XP2.C16 | length 1039.9
  Mid-Layer 5 w5: XP2.C16@1825,4450.01 1800.5,4425.51 1800.5,4292.4 1948.82,4144.08 1948.82,4028.94 1988.03,3989.74 1988.03,3597.64 1976.59,3586.2 1949.01,3586.2 v1(1929.14,3566.33)
  Bottom Layer w6: v1(1929.14,3566.33) U1.V23@1948.82,3546.66
XP2C_17: U1.R24 XP2.C17 | length 1003.6
  Mid-Layer 2 w5: XP2.C17@1875,4450.01 1900,4425.01 1900,4304.14 2119.74,4084.4 2119.74,3973.49 2066.93,3920.67 2066.93,3625.4 v1(2086.63,3605.7)
  Bottom Layer w6: U1.R24@2066.94,3586.02 v1(2086.63,3605.7)
XP2C_18: U1.P25 XP2.C18 | length 947.5
  Mid-Layer 2 w5: XP2.C18@1925,4450.01 1950,4425.01 1950,4303.35 2144.11,4109.24 2144.11,3958.49 2106.14,3920.51 2106.14,3664.93 v1(2125.99,3645.07)
  Bottom Layer w6: U1.P25@2106.3,3625.4 v1(2125.99,3645.07)
XP2C_19: U1.M19 XP2.C19 | length 1265
  Mid-Layer 5 w5: XP2.C19@1975,4450.01 1950,4425.01 1950,4303.17 2066.74,4186.42 2066.74,3955.12 2046.56,3934.94 2046.56,3458.76 2076.77,3428.55 2185.01,3428.55 v1(2204.72,3408.84)
  Bottom Layer w6: U1.M19@2185.04,3389.18 v1(2204.72,3408.84)
XP2C_22: U1.M26 XP2.C22 | length 887.6
  Mid-Layer 2 w5: XP2.C22@2125,4450.01 2100,4425.01 2100,4271.46 2234.07,4137.4 2234.07,3969.7 2185.22,3920.86 2185.22,3703.96 v1(2204.73,3684.45)
  Bottom Layer w6: U1.M26@2185.04,3664.77 v1(2204.73,3684.45)
XP2C_23: U1.L30 XP2.C23 | length 737.3
  Mid-Layer 2 w5: XP2.C23@2175,4450.01 2150.5,4425.51 2150.5,4322.36 2302.96,4169.89 2302.96,3967.75 2263.78,3928.57 2263.78,3889.5 2244.09,3869.81 v1(2244.09,3841.93)
  Bottom Layer w6: U1.L30@2224.41,3822.25 2224.41,3824.08 U1.L30@2224.41,3822.25 v1(2244.09,3841.93)
XP2C_24: U1.L29 XP2.C24 | length 776.9
  Mid-Layer 2 w5: XP2.C24@2225,4450.01 2200.5,4425.51 2200.5,4328.44 2332.68,4196.27 2332.68,3920.67 2263.78,3851.78 2263.78,3822.25 v1(2244.09,3802.56)
  Bottom Layer w6: U1.L29@2224.41,3782.88 v1(2244.09,3802.56)
XP2C_30: U1.M27 XP2.C30 | length 1086.2
  Mid-Layer 1 w5: v1(2204.73,3723.82) 2224.41,3743.5 2224.41,3861.68 2234.25,3871.53 2234.25,4058.47 2273.62,4097.84 2535.45,4097.84 2580.74,4143.13 2580.74,4284.85 2550,4315.59 2550,4425.01 XP2.C30@2525,4450.01
  Bottom Layer w6: U1.M27@2185.04,3704.14 v1(2204.73,3723.82)
XP2C_37: U1.K27 XP2.C37 | length 1143.2
  Mid-Layer 1 w5: v1(2283.48,3723.82) 2303.15,3743.49 2303.15,4009.26 2332.68,4038.79 2578.74,4038.79 2850,4310.04 2850,4425.01 XP2.C37@2875,4450.01
  Bottom Layer w6: U1.K27@2263.78,3704.14 v1(2283.48,3723.82)
XP2C_38: U1.L21 XP2.C38 | length 1674.6
  Mid-Layer 2 w5: v1(2244.1,3487.6) 2224.41,3507.29 2224.41,3574.23 2236.21,3586.03 2409.48,3586.03 2421.26,3597.81 2421.26,3692.34 2433.06,3704.14 2488.23,3704.14 2500,3715.91 2500,4068.31 2519.68,4088 2913.39,4088 2951,4125.61 2951,4299.01 2950,4300.01 2950,4425.01 XP2.C38@2925,4450.01
  Bottom Layer w6: U1.L21@2224.41,3467.92 v1(2244.1,3487.6)
XP2D_3: U1.W29 XP2.D3 | length 1369.5
  Mid-Layer 5 w5: XP2.D3@1175,4500.01 1150.5,4475.51 1150.5,4209.13 1320.85,4038.79 1673.23,4038.79 1712.6,3999.41 1712.6,3800.1 1729.66,3783.04 1870.24,3783.04 v1(1889.76,3802.56) v1(1889.76,3802.56)
  Bottom Layer w6: v1(1889.76,3802.56) U1.W29@1909.45,3782.88
XP2D_4: U1.W24 XP2.D4 | length 1466.4
  Mid-Layer 5 w5: XP2.D4@1225,4500.01 1200,4475.01 1200,4302.86 1375.49,4127.37 1771.67,4127.37 1850.39,4048.65 1850.39,3912.78 1909.29,3853.88 1909.29,3625.22 v1(1889.78,3605.7)
  Bottom Layer w6: v1(1889.78,3605.7) U1.W24@1909.45,3586.03
XP2D_10: U1.AA19 XP2.D10 | length 1246.7
  Mid-Layer 4 w5: XP2.D10@1525,4500.01 1550,4475.01 1550,4305.12 1555.12,4300.01 1555.12,4019.1 1751.8,3822.42 1751.8,3597.98 1763.95,3585.83 1779.74,3585.83 1791.34,3574.23 1791.34,3428.54 v1(1811.03,3408.84)
  Bottom Layer w6: v1(1811.03,3408.84) U1.AA19@1830.71,3389.18
XP2D_11: U1.AB30 XP2.D11 | length 780.1
  Mid-Layer 4 w5: XP2.D11@1575,4500.01 1600,4475.01 1600,4304.53 1584.65,4289.18 1584.65,4028.94 v1(1771.65,3841.93)
  Bottom Layer w5: v1(1771.65,3841.93) U1.AB30@1791.34,3822.25
XP2D_12: U1.Y19 XP2.D12 | length 1212.4
  Mid-Layer 4 w5: XP2.D12@1625,4500.01 1650,4475.01 1650,4032.49 1830.71,3851.78 1830.71,3428.54 v1(1850.4,3408.84)
  Bottom Layer w5: v1(1850.4,3408.84) U1.Y19@1870.08,3389.18
XP2D_13: U1.T25 XP2.D13 | length 1157.6
  Mid-Layer 2 w5: XP2.D13@1675,4500.01 1700,4475.01 1700,4302.37 1796.07,4206.29 1946.68,4206.29 2066.74,4086.23 2066.74,3959.86 2037.4,3930.52 2037.4,3674.59 v1(2007.88,3645.07)
  Bottom Layer w6: v1(2007.88,3645.07) U1.T25@2027.56,3625.4
XP2D_14: U1.M20 XP2.D14 | length 1449
  Mid-Layer 4 w5: XP2.D14@1725,4500.01 1750,4475.01 1750,4267.13 1948.82,4068.31 1948.82,3440.31 1960.44,3428.69 2185.22,3428.69 v1(2204.72,3448.19)
  Bottom Layer w6: U1.M20@2185.04,3428.52 v1(2204.72,3448.19)
XP2D_15: U1.AC27 XP2.D15 | length 842.4
  Mid-Layer 1 w5: v1(1732.29,3723.82) 1752.15,3743.68 1752.15,4197.82 1799.5,4245.17 1799.5,4300.71 1800,4301.21 1800,4475.01 XP2.D15@1775,4500.01
  Bottom Layer w6: v1(1732.29,3723.82) U1.AC27@1751.98,3704.13
XP2D_16: U1.Y23 XP2.D16 | length 1127.3
  Mid-Layer 7 w5: XP2.D16@1825,4500.01 1800,4475.01 1800,4324.22 1712.78,4237 1712.78,3597.63 1724.58,3585.83 1830.89,3585.83 v1(1850.39,3566.33)
  Bottom Layer w6: v1(1850.39,3566.33) U1.Y23@1870.08,3546.66
XP2D_17: U1.M18 XP2.D17 | length 1401
  Mid-Layer 5 w5: XP2.D17@1875,4500.01 1850,4475.01 1850,4324.61 1894.68,4279.93 1932.1,4279.93 2027.56,4184.47 2027.56,3438.39 2076.77,3389.18 2185.03,3389.18 v1(2204.73,3369.48)
  Bottom Layer w6: U1.M18@2185.04,3349.81 v1(2204.73,3369.48)
XP2D_18: U1.V24 XP2.D18 | length 1152.5
  Mid-Layer 7 w5: XP2.D18@1925,4500.01 1899.61,4474.61 1899.61,4338.8 1751.97,4191.16 1751.97,3637.18 1763.58,3625.57 1909.28,3625.57 v1(1929.14,3605.7)
  Bottom Layer w6: v1(1929.14,3605.7) U1.V24@1948.83,3586.02
XP2D_23: U1.P23 XP2.D23 | length 1005.4
  Mid-Layer 5 w5: v1(2125.99,3566.33) 2106.49,3585.84 2106.49,3782.88 2106.48,3812.41 2125.11,3831.04 2125.11,4059.34 2116.14,4068.31 2116.14,4275.01 2149.5,4308.36 2149.5,4474.51 XP2.D23@2175,4500.01
  Bottom Layer w6: U1.P23@2106.3,3546.66 v1(2125.99,3566.33)
XP2D_24: U1.K26 XP2.D24 | length 957.1
  Mid-Layer 2 w5: XP2.D24@2225,4500.01 2249.5,4475.51 2249.5,4320.76 2391.55,4178.72 2391.55,4076.02 2381.7,4066.18 2381.7,3930.33 2302.99,3851.61 2302.99,3703.96 v1(2283.48,3684.45)
  Bottom Layer w6: U1.K26@2263.78,3664.77 v1(2283.48,3684.45)
XP2D_37: U1.M30 XP2.D37 | length 1150.3
  Mid-Layer 7 w5: v1(2204.72,3841.93) 2195.07,3851.59 2195.07,3970.07 2214.57,3989.57 2519.69,3989.57 2850,4319.89 2850,4475.01 XP2.D37@2875,4500.01
  Bottom Layer w6: U1.M30@2185.04,3822.25 v1(2204.72,3841.93)
XP2D_38: U1.H26 XP2.D38 | length 1264.8
  Mid-Layer 2 w5: v1(2362.2,3684.45) 2382.07,3704.32 2382.07,3851.96 2460.63,3930.52 2460.63,4099.62 2529.53,4168.52 2846.27,4168.52 2903.36,4225.61 2903.36,4301.18 2900,4304.53 2900,4475.01 XP2.D38@2925,4500.01
  Bottom Layer w6: U1.H26@2342.52,3664.77 v1(2362.2,3684.45)
XP3A_3: U1.AB7 XP3.A3 | length 1319.4
  Mid-Layer 5 w5: XP3.A3@1174.41,1924.42 XP3.A3@1175,1923.83 ; XP3.A3@1175,1925.01 1199.5,1949.51 1199.5,2132.97 1247.54,2181.01 1247.54,2333.57 1594.49,2680.52 1700.82,2680.52 1712.79,2692.48 1712.79,2787 1724.22,2798.43 1740,2798.43 1751.79,2810.22 1751.79,2877.18 v1(1771.66,2897.05)
  Bottom Layer w6: v1(1771.66,2897.05) U1.AB7@1791.34,2916.74
XP3A_4: U1.AF3 XP3.A4 | length 1003.6
  Mid-Layer 4 w5: XP3.A4@1225,1925.01 1250.5,1950.51 1250.5,2277.47 1614.18,2641.15 v1(1614.18,2739.57)
  Bottom Layer w6: v1(1614.18,2739.57) U1.AF3@1633.86,2759.26
XP3A_5: U1.AA7 XP3.A5 | length 1298.9
  Mid-Layer 5 w5: XP3.A5@1275,1923.83 XP3.A5@1275.59,1924.42 ; XP3.A5@1275,1925.01 1300,1950.01 1300,2315.18 1625.97,2641.15 1740.18,2641.15 1751.8,2652.77 1751.8,2747.28 1763.58,2759.07 1779.37,2759.07 1791.16,2770.86 1791.16,2877.18 v1(1811.03,2897.05)
  Bottom Layer w6: v1(1811.03,2897.05) U1.AA7@1830.71,2916.74
XP3A_6: U1.AA3 XP3.A6 | length 1086.4
  Mid-Layer 5 w5: XP3.A6@1325,1923.83 XP3.A6@1325.59,1924.42 ; XP3.A6@1325,1925.01 1350,1950.01 1350,2290.85 1670.77,2611.62 1742.13,2611.62 1781.5,2650.99 1781.5,2710.03 v1(1811.03,2739.57)
  Bottom Layer w6: v1(1811.03,2739.57) U1.AA3@1830.71,2759.26
XP3A_7: U1.Y7 XP3.A7 | length 1229.4
  Mid-Layer 5 w5: XP3.A7@1375,1923.83 XP3.A7@1376.18,1925.01 ; XP3.A7@1375,1925.01 XP3.A7@1376.18,1925.01 ; v1(1850.39,2897.05) 1830.89,2877.55 1830.89,2651.17 1751.97,2572.25 1700.3,2572.25 1400,2271.95 1400,1948.83 XP3.A7@1376.18,1925.01
  Bottom Layer w6: v1(1850.39,2897.05) U1.Y7@1870.08,2916.74
XP3A_8: U1.AD2 XP3.A8 | length 934.3
  Mid-Layer 7 w5: XP3.A8@1425,1925.01 1400.5,1949.51 1400.5,2289.68 1673.23,2562.41 1673.23,2621.47 1692.91,2641.15 v1(1692.91,2700.19)
  Bottom Layer w6: v1(1692.91,2700.19) U1.AD2@1712.6,2719.89
XP3A_9: U1.AB9 XP3.A9 | length 1239.1
  Mid-Layer 4 w5: XP3.A9@1475,1923.82 1450.5,1948.32 1450.5,2313.12 1712.6,2575.22 1712.6,2944.3 1724.41,2956.11 1751.98,2956.11 v1(1771.66,2975.78)
  Bottom Layer w6: v1(1771.66,2975.78) U1.AB9@1791.34,2995.48
XP3A_10: U1.AC1 XP3.A10 | length 871
  Mid-Layer 4 w5: XP3.A10@1525,1923.82 1500.5,1948.32 1500.5,2301.1 1732.19,2532.79 v1(1732.19,2660.74)
  Bottom Layer w5: v1(1732.19,2660.74) U1.AC1@1751.97,2680.52
XP3A_11: U1.Y8 XP3.A11 | length 1219.1
  Mid-Layer 5 w5: XP3.A11@1575,1925.01 1601,1951.01 1600,1952.01 1600,2105.32 1665.85,2171.17 1665.85,2348.33 1879.92,2562.41 1879.92,2621.46 1909.28,2650.83 1909.28,2905.13 1897.86,2916.56 1870.25,2916.56 v1(1850.39,2936.42)
  Bottom Layer w6: v1(1850.39,2936.42) U1.Y8@1870.08,2956.11
XP3A_12: U1.AA6 XP3.A12 | length 1092
  Mid-Layer 4 w5: 1612.5,1936.32 XP3.A12@1625,1923.82 ; XP3.A12@1625,1925.01 1600.5,1949.51 1600.5,2155.03 1623.83,2178.36 1623.83,2298.42 1791.34,2465.93 1791.34,2650.8 1830.89,2690.36 1830.89,2837.82 v1(1811.03,2857.68)
  Bottom Layer w6: v1(1811.03,2857.68) U1.AA6@1830.71,2877.37
XP3A_13: U1.V3 XP3.A13 | length 947.7
  Mid-Layer 5 w5: XP3.A13@1675,1925.01 1700,1950.01 1700,2303.75 1909.45,2513.19 1909.45,2611.62 1929.14,2631.31 v1(1929.14,2739.57)
  Bottom Layer w6: v1(1929.14,2739.57) U1.V3@1948.82,2759.26
XP3A_14: U1.AA10 XP3.A14 | length 1241.7
  Mid-Layer 4 w5: XP3.A14@1725,1923.82 1700,1948.82 1700,2212.19 1853.36,2365.56 1853.36,2624.43 1870.08,2641.15 1870.08,2985.64 1860.24,2995.48 1830.7,2995.48 v1(1811.03,3015.15)
  Bottom Layer w6: v1(1811.03,3015.15) U1.AA10@1830.71,3034.85
XP3A_15: U1.V8 XP3.A15 | length 1140.8
  Mid-Layer 5 w5: XP3.A15@1774.41,1924.42 XP3.A15@1775,1923.83 ; XP3.A15@1775,1925.01 1750,1950.01 1750,2257.29 1937.19,2444.48 ; v1(1929.14,2936.42) 1948.65,2916.91 1948.65,2513.03 ; 1937.21,2444.48 1948.63,2455.9 1948.63,2513.01
  Bottom Layer w6: v1(1929.14,2936.42) U1.V8@1948.82,2956.11
XP3A_16: U1.W5 XP3.A16 | length 1013
  Mid-Layer 4 w5: XP3.A16@1825,1925.01 1849.5,1949.51 1849.5,2138.28 1948.82,2237.6 1948.82,2786.83 1937.22,2798.43 1909.64,2798.43 v1(1889.78,2818.3)
  Bottom Layer w6: v1(1889.78,2818.3) U1.W5@1909.45,2838
XP3A_17: U1.W10 XP3.A17 | length 1323.2
  Mid-Layer 5 w5: XP3.A17@1874.41,1924.42 XP3.A17@1875,1923.83 ; XP3.A17@1875,1925.01 1850,1950.01 1850,2168.31 2027.56,2345.87 2027.56,2985.64 2017.54,2995.65 1909.28,2995.65 v1(1889.78,3015.15)
  Bottom Layer w6: v1(1889.78,3015.15) U1.W10@1909.45,3034.85
XP3A_18: U1.U5 XP3.A18 | length 956.3
  Mid-Layer 4 w5: XP3.A18@1925,1923.82 XP3.A18@1925.59,1924.41 ; XP3.A18@1925,1925.01 1950,1950.01 1950,2169.89 1988.19,2208.08 1988.19,2798.62 v1(1968.51,2818.3)
  Bottom Layer w6: v1(1968.51,2818.3) U1.U5@1988.19,2838
XP3A_20: U1.T9 XP3.A20 | length 1121.6
  Mid-Layer 4 w5: v1(2007.88,2975.78) 2037.4,2946.26 2037.4,2641.15 2066.93,2611.62 2066.93,2124.58 2050,2107.65 2050,1948.82 XP3.A20@2025,1923.82
  Bottom Layer w6: v1(2007.88,2975.78) U1.T9@2027.56,2995.48
XP3A_21: U1.N9 XP3.A21 | length 1216
  Mid-Layer 5 w5: XP3.A21@2074.41,1924.42 XP3.A21@2075,1923.83 ; XP3.A21@2075,1925.01 2050,1950.01 2050,2099.8 2067.11,2116.91 2067.11,2983.85 2078.56,2995.29 2145.85,2995.29 v1(2165.36,2975.78)
  Bottom Layer w6: U1.N9@2145.68,2995.47 v1(2165.36,2975.78)
XP3A_23: U1.N8 XP3.A23 | length 1109
  Mid-Layer 5 w5: v1(2165.36,2936.42) 2164.99,2936.42 2145.13,2916.55 2117.92,2916.55 2106.49,2905.13 2106.49,2188.2 2150,2144.69 2150,1950.01 XP3.A23@2175,1925.01 ; XP3.A23@2174.41,1924.42 XP3.A23@2175,1923.83
  Bottom Layer w6: U1.N8@2145.68,2956.1 v1(2165.36,2936.42)
XP3A_24: U1.N7 XP3.A24 | length 1043.1
  Mid-Layer 5 w5: v1(2165.36,2897.05) 2145.85,2877.54 2145.85,2237.42 2200,2183.27 2200,1948.83 XP3.A24@2223.82,1925.01 ; XP3.A24@2225,1923.83 XP3.A24@2223.82,1925.01 ; XP3.A24@2225,1925.01 XP3.A24@2223.82,1925.01
  Bottom Layer w6: U1.N7@2145.68,2916.73 v1(2165.36,2897.05)
XP3A_25: U1.R3 XP3.A25 | length 920.4
  Mid-Layer 4 w5: v1(2086.63,2739.57) 2135.83,2690.37 2135.83,2318.29 2250.5,2203.62 2250.5,1949.51 XP3.A25@2275,1925.01
  Bottom Layer w6: U1.R3@2066.93,2759.26 v1(2086.63,2739.57)
XP3A_26: U1.M7 XP3.A26 | length 1066.8
  Mid-Layer 4 w5: v1(2204.73,2897.05) 2185.04,2877.36 2185.04,2345.87 2299.5,2231.41 2299.5,1950.51 XP3.A26@2325,1925.01 ; XP3.A26@2324.41,1924.42 XP3.A26@2325,1923.83
  Bottom Layer w6: U1.M7@2185.04,2916.74 v1(2204.73,2897.05)
XP3A_27: U1.M2 XP3.A27 | length 874.7
  Mid-Layer 5 w5: v1(2204.72,2700.2) 2204.72,2660.83 2214.57,2650.99 2214.57,2390.16 2350.5,2254.23 2350.5,1948.32 XP3.A27@2375,1923.82
  Bottom Layer w6: U1.M2@2185.04,2719.89 v1(2204.72,2700.2)
XP3A_28: U1.K1 XP3.A28 | length 838.9
  Mid-Layer 4 w5: v1(2283.46,2660.83) 2303.15,2641.15 2303.15,2532.88 2419,2417.03 2419,2108.97 2400,2089.97 2400,1950.01 XP3.A28@2425,1925.01 ; XP3.A28@2424.41,1924.42 XP3.A28@2425,1923.83
  Bottom Layer w5: U1.K1@2263.78,2680.52 v1(2283.46,2660.83)
XP3A_29: U1.L10 XP3.A29 | length 1229.3
  Mid-Layer 5 w5: v1(2244.09,3015.15) 2224.59,2995.65 2224.59,2685.26 2239.17,2670.67 2239.17,2439.38 2450,2228.55 2450,1948.83 XP3.A29@2473.82,1925.01
  Bottom Layer w6: U1.L10@2224.41,3034.85 v1(2244.09,3015.15)
XP3A_30: U1.K11 XP3.A30 | length 1275.9
  Mid-Layer 5 w5: v1(2283.48,3054.53) 2263.96,3035.02 2263.96,2708.28 2263.96,2692.13 2263.96,2491.37 2500,2255.34 2500,1948.83 XP3.A30@2523.82,1925.01 ; XP3.A30@2525,1923.83 XP3.A30@2523.82,1925.01 ; XP3.A30@2525,1925.01 XP3.A30@2523.82,1925.01
  Bottom Layer w6: U1.K11@2263.78,3074.22 v1(2283.48,3054.53)
XP3A_31: U1.K10 XP3.A31 | length 1259.9
  Mid-Layer 5 w5: v1(2283.48,3015.15) 2302.98,2995.65 2302.98,2516.34 2599.5,2219.82 2599.5,1949.51 XP3.A31@2575,1925.01 ; XP3.A31@2574.41,1924.42 XP3.A31@2575,1923.83
  Bottom Layer w6: U1.K10@2263.78,3034.85 v1(2283.48,3015.15)
XP3A_32: U1.J8 XP3.A32 | length 1166.6
  Mid-Layer 4 w5: v1(2322.84,2936.42) 2342.34,2916.92 2342.34,2720.06 2362.2,2700.2 2362.2,2589.98 2534.63,2417.56 2534.63,2183.29 2599.5,2118.42 2599.5,1951.67 2598.33,1950.5 XP3.A32@2625,1923.83
  Bottom Layer w6: U1.J8@2303.15,2956.11 v1(2322.84,2936.42)
XP3A_33: U1.J10 XP3.A33 | length 1264.7
  Mid-Layer 5 w5: v1(2322.84,3015.15) 2342.34,2995.65 2342.34,2552.74 2650,2245.08 2650,1950.01 XP3.A33@2675,1925.01 ; XP3.A33@2674.41,1924.42 XP3.A33@2675,1923.83
  Bottom Layer w6: U1.J10@2303.15,3034.85 v1(2322.84,3015.15)
XP3A_34: U1.H7 XP3.A34 | length 1150.2
  Mid-Layer 5 w5: v1(2362.21,2897.05) 2382.07,2877.19 2382.07,2583.86 2700,2265.93 2700,1950.01 XP3.A34@2725,1925.01
  Bottom Layer w6: U1.H7@2342.52,2916.74 v1(2362.21,2897.05)
XP3A_35: U1.H8 XP3.A35 | length 1226.4
  Mid-Layer 5 w5: v1(2362.21,2936.42) 2382.08,2916.55 2409.65,2916.55 2421.08,2905.13 2421.08,2621.64 2750,2292.72 2750,1950.01 XP3.A35@2775,1925.01
  Bottom Layer w6: U1.H8@2342.52,2956.11 v1(2362.21,2936.42)
XP3A_36: U1.K12 XP3.A36 | length 1461.4
  Mid-Layer 7 w5: v1(2283.48,3093.9) 2303.16,3074.22 2372.05,3074.22 2381.89,3064.38 2381.89,2511.24 2800,2093.13 2800,1950.01 XP3.A36@2825,1925.01
  Bottom Layer w6: U1.K12@2263.78,3113.59 v1(2283.48,3093.9)
XP3A_37: U1.G5 XP3.A37 | length 1118.1
  Mid-Layer 2 w5: v1(2401.58,2818.3) 2421.44,2798.44 2421.44,2690.18 2850,2261.62 2850,1950.01 XP3.A37@2875,1925.01 ; XP3.A37@2874.41,1924.42 XP3.A37@2875,1923.83
  Bottom Layer w6: U1.G5@2381.89,2838 v1(2401.58,2818.3)
XP3A_38: U1.G7 XP3.A38 | length 1216.7
  Mid-Layer 7 w5: v1(2401.58,2897.05) 2421.26,2877.37 2421.26,2567.33 2900,2088.59 2900,1950.01 XP3.A38@2925,1925.01
  Bottom Layer w6: U1.G7@2381.89,2916.74 v1(2401.58,2897.05)
XP3B_3: U1.AE3 XP3.B3 | length 991.5
  Mid-Layer 2 w5: XP3.B3@1175,1973.83 XP3.B3@1175.59,1974.42 ; XP3.B3@1175,1975.01 1199.5,1999.51 1199.5,2149.68 1633.67,2583.86 1633.67,2719.68 v1(1653.56,2739.57)
  Bottom Layer w6: v1(1653.56,2739.57) U1.AE3@1673.23,2759.26
XP3B_4: U1.AE5 XP3.B4 | length 1065.6
  Mid-Layer 2 w5: XP3.B4@1225,1973.83 XP3.B4@1225.59,1974.42 ; XP3.B4@1225,1975.01 1250,2000.01 1250,2119.49 1673.06,2542.55 1673.06,2798.8 v1(1653.56,2818.3)
  Bottom Layer w6: v1(1653.56,2818.3) U1.AE5@1673.23,2838
XP3B_5: U1.AD6 XP3.B5 | length 1120.1
  Mid-Layer 7 w5: XP3.B5@1275,1975.01 1250.5,1999.51 1250.5,2265.68 1614.86,2630.04 1614.86,2671.36 1633.68,2690.17 1633.68,2825.99 1645.87,2838.18 1673.43,2838.18 v1(1692.93,2857.68)
  Bottom Layer w6: v1(1692.93,2857.68) U1.AD6@1712.6,2877.37
XP3B_6: U1.AE1 XP3.B6 | length 892.1
  Mid-Layer 7 w5: 1310.49,1989.51 1300.5,1999.5 ; XP3.B6@1325,1975.01 1300.5,1999.51 ; v1@1645.65,2660.83 v1(1653.54,2660.83) 1643.7,2650.99 1643.7,2591.93 1300.5,2248.73 1300.5,1999.51
  Bottom Layer w6: v1@1653.54,2660.82 U1.AE1@1673.23,2680.52
XP3B_7: U1.AC5 XP3.B7 | length 1020
  Mid-Layer 2 w5: XP3.B7@1375,1973.83 XP3.B7@1375.59,1974.42 ; XP3.B7@1375,1975.01 1400,2000.01 1400,2123.81 1712.43,2436.24 1712.43,2795.94 1732.29,2815.8 v1(1732.29,2818.3)
  Bottom Layer w6: v1(1732.29,2818.3) U1.AC5@1751.98,2837.98
XP3B_8: U1.AB6 XP3.B8 | length 1054.9
  Mid-Layer 2 w5: XP3.B8@1425,1973.83 XP3.B8@1425.59,1974.42 ; XP3.B8@1425,1975.01 1450,2000.01 1450,2112.8 1751.8,2414.6 1751.8,2837.83 v1(1771.66,2857.68)
  Bottom Layer w6: v1(1771.66,2857.68) U1.AB6@1791.34,2877.37